# Altium PCB relay_m66.PcbDoc
Units mm, origin at the board's own origin, x right, y up, seen from the top; angles counter-clockwise.
Board outline 83.06 x 99.04 mm, 2 copper layers (Top Layer, Bottom Layer); 45 components, 47 nets, 201 pads, 22 vias.
Unrouted connection lines stored in the file: 1.
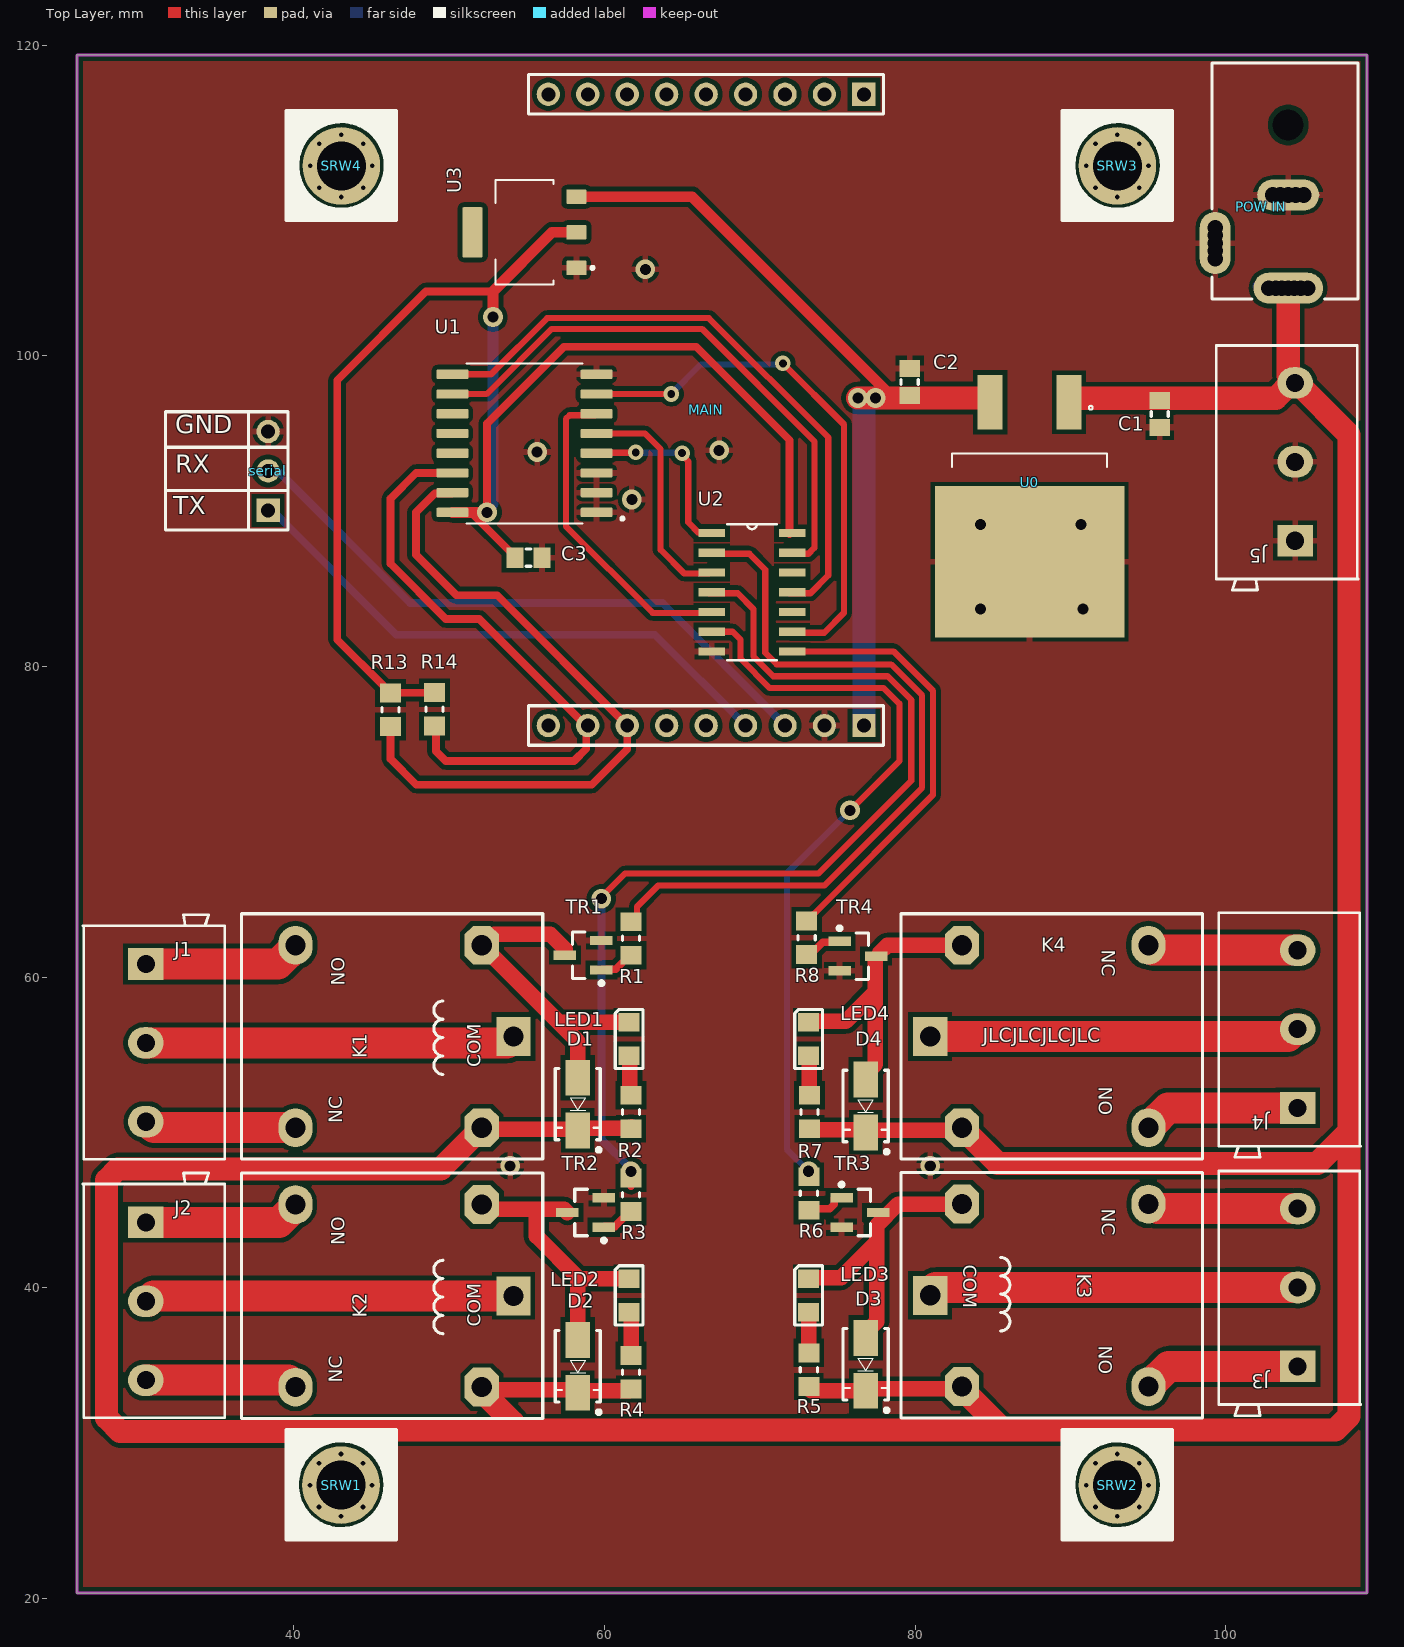
[diagram p0: Top Layer view]
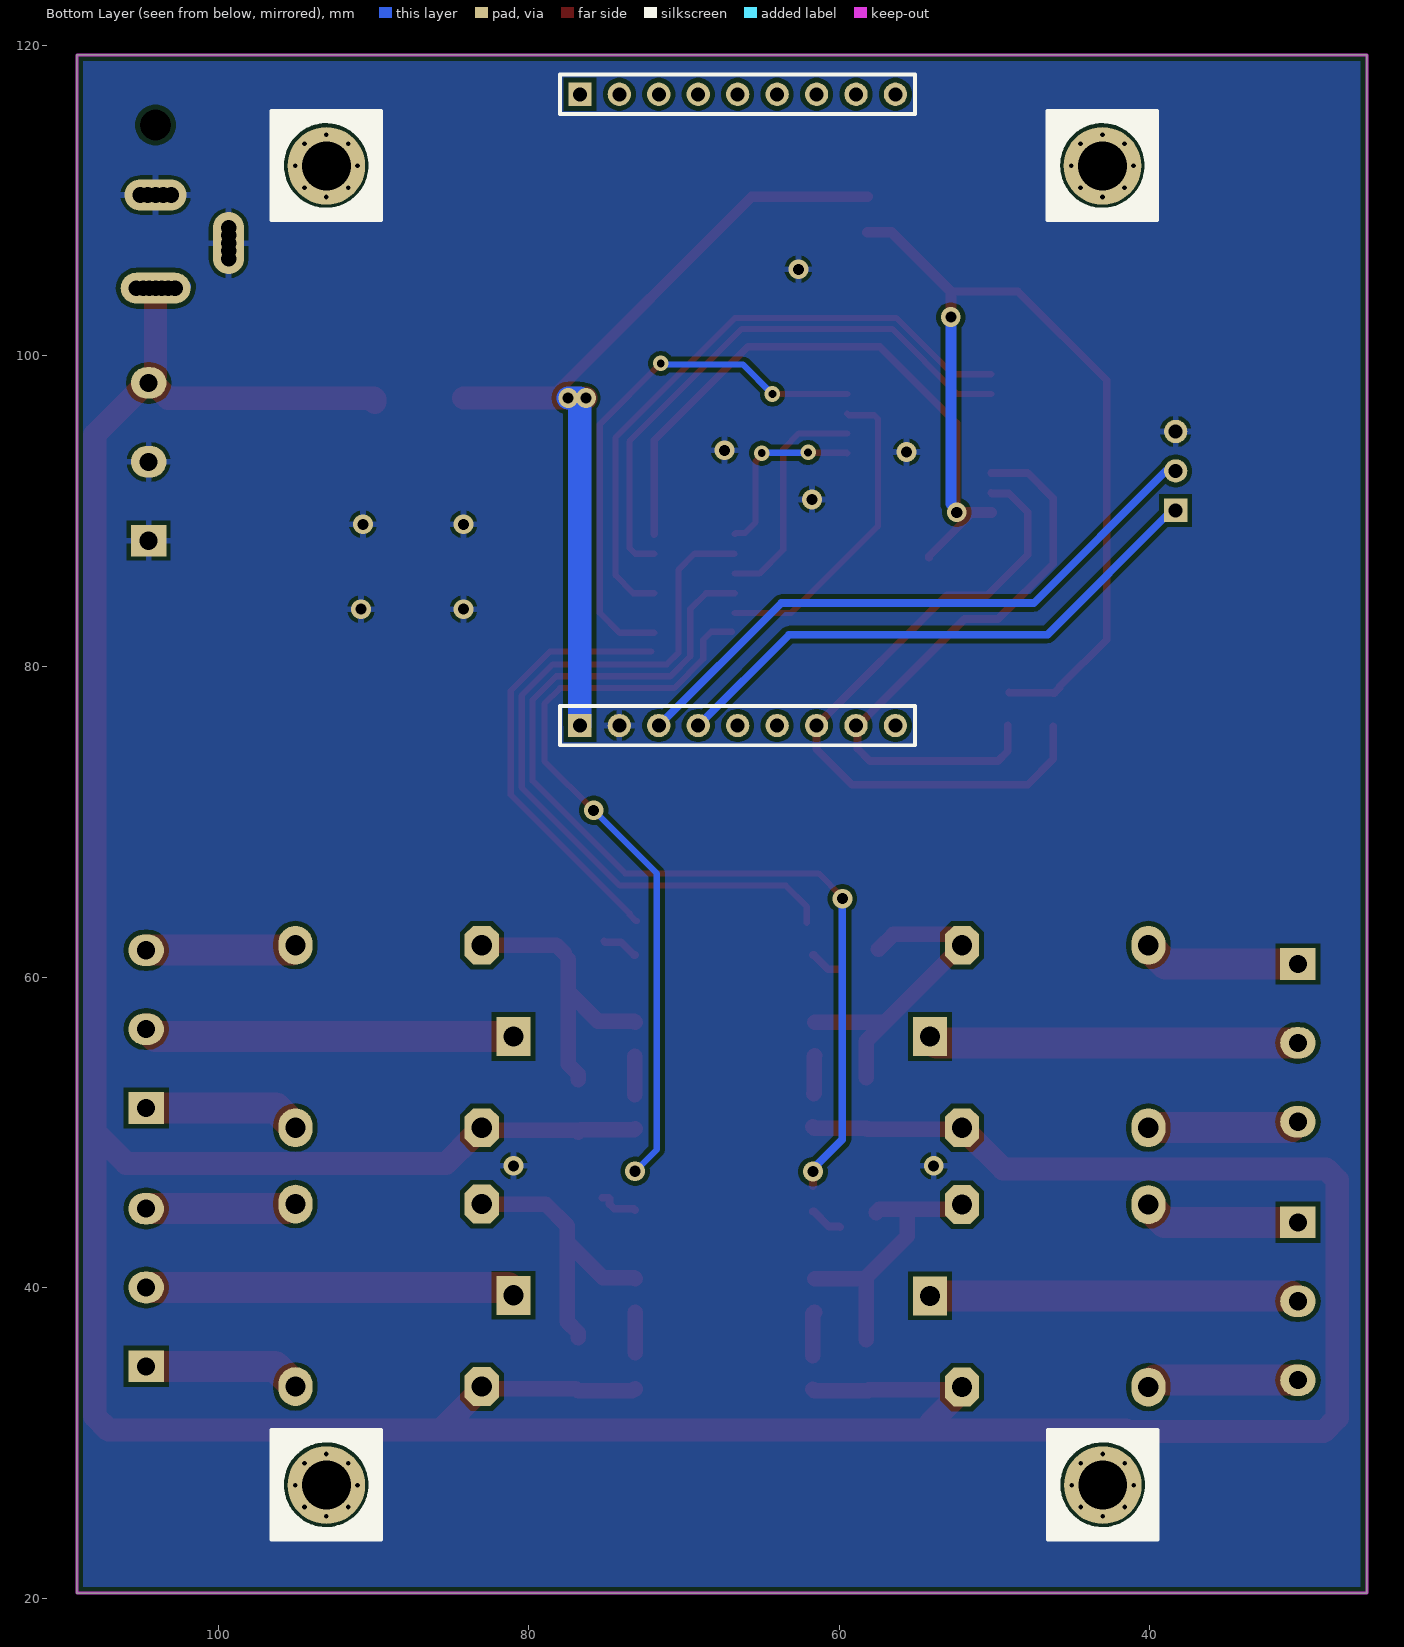
[diagram p1: Bottom Layer view, seen from below]
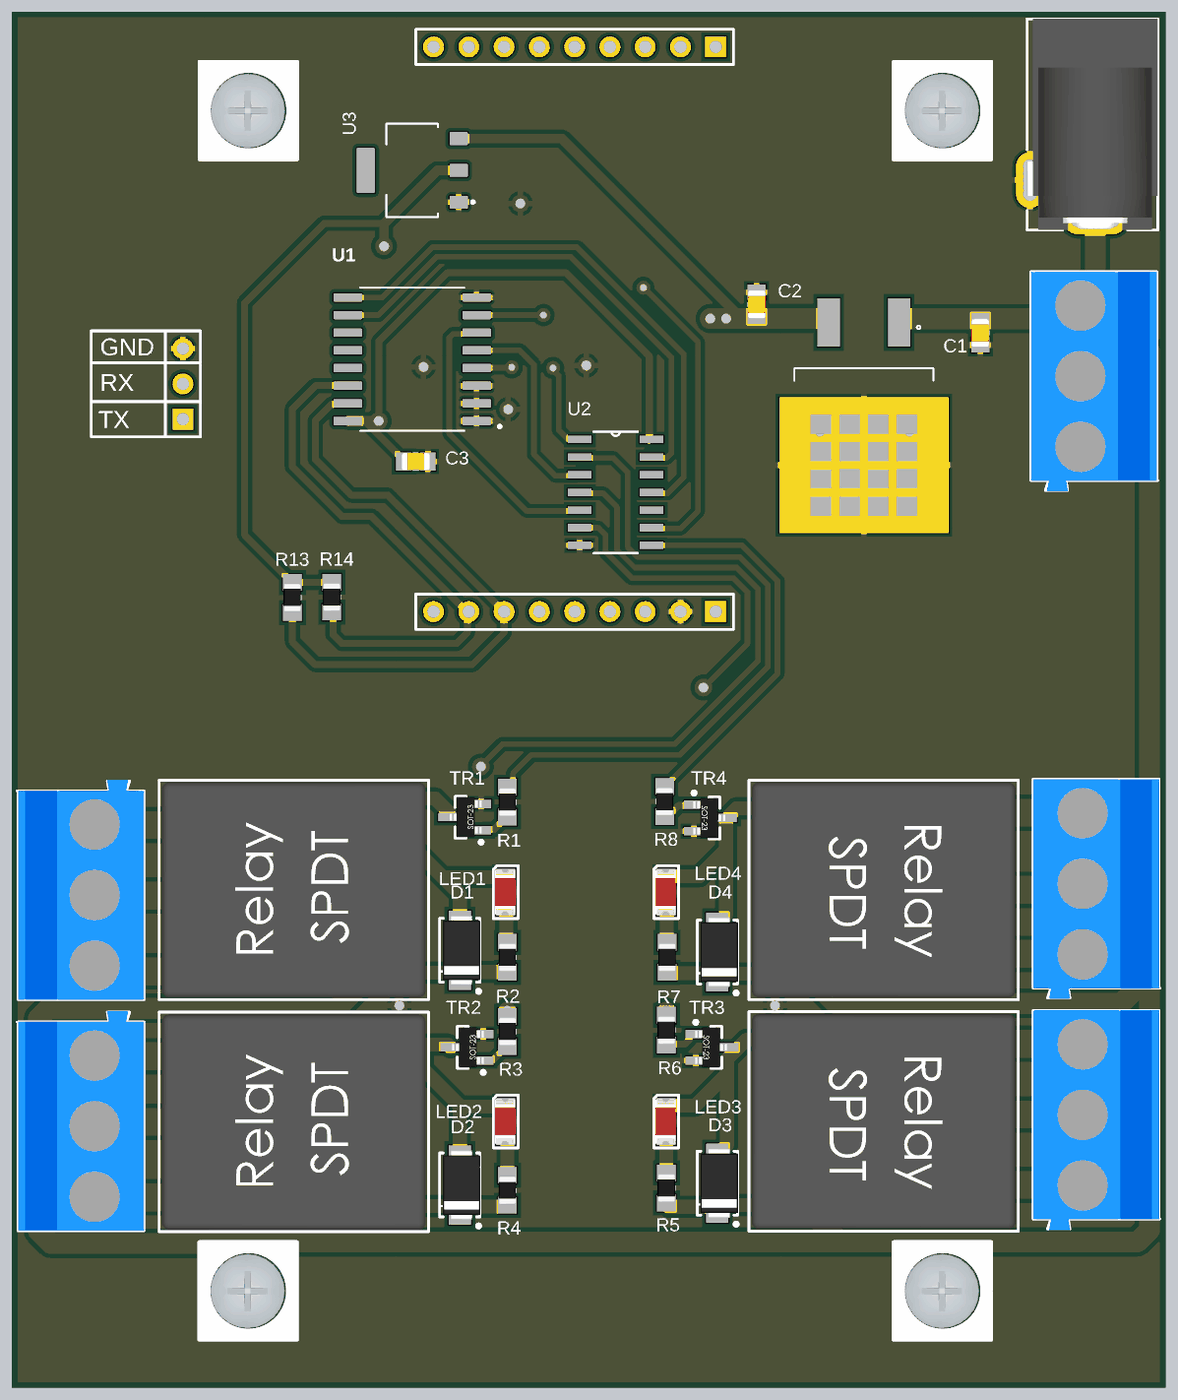
[diagram p2: 3D render of the assembled board from above, using the file's embedded part models]

## Layer stack, top to bottom
Top Solder: solder mask 0.0102, Solder Resist, Dk 3.5
Top Layer: signal copper 0.0356
Dielectric 1: dielectric 0.32, FR-4, Dk 4.8
Bottom Layer: signal copper 0.0356
Bottom Solder: solder mask 0.0102, Solder Resist, Dk 3.5

## Board outline
26.035,20.337 109.093,20.337 109.093,119.38 26.033,119.38 26.035,119.32

## Design rules (kind name [scope] priority, off if disabled: settings)
Clearance [All] p1: gap=0.3 ignorepadtopadclearanceinfootprint=FALSE
PolygonConnect [All] p1: connectstyle=Relief reliefconductorwidth=0.4 reliefentries=4 polygonreliefangle="90 Angle" airgapwidth=0.254
RoutingVias [All] p1: holewidth=0.711 width=1.27 viastyle="Through Hole" minholewidth=0.711 minwidth=1.27 maxholewidth=0.711 maxwidth=1.27
SolderMaskExpansion [All] p1: expansion=0.102 istentingtop=FALSE
Width [All] p1: maxlimit=3 minlimit=0.254 preferedwidth=0.254
30 further rules are at their usual default settings.

## Components (designator, comment, footprint, x,y, rotation, side; value= is the part's Value field where it differs from the comment)
C1 "33nf" "SMD 0805" 95.758,96.266 r90 top
C2 "100nf" "SMD 0805" 79.656,98.32 r270 top
C3 "33nf" "SMD 0805" 55.107,87.005 r0 top
D1 "1n4007" DIOM4629X24N 58.282,51.826 r270 top
D2 "1n4007" DIOM4629X24N 58.282,34.935 r270 top
D3 "1n4007" DIOM4629X24N 76.824,35.062 r270 top
D4 "1n4007" DIOM4629X24N 76.824,51.699 r270 top
J1 "TBlock-3" "KF300-3 PIN" 30.469,60.843 r0 top
J2 "TBlock-3" "KF300-3 PIN" 30.469,44.206 r0 top
J3 "TBlock-3" "KF300-3 PIN" 104.637,34.934 r180 top
J4 "TBlock-3" "KF300-3 PIN" 104.637,51.571 r180 top
J5 "TBlock-3" "KF300-3 PIN" 104.476,88.1 r180 top
K1 "" "Relay 18.85x15.35x15.70" 47.128,56.177 r90 top
K2 "" "Relay 18.85x15.35x15.70" 47.128,39.474 r90 top
K3 "" "Relay 18.85x15.35x15.70" 88,39.507 r270 top
K4 "" "Relay 18.85x15.35x15.70" 88,56.177 r270 top
LED1 "LED 2PIN" "LED 0805" 61.584,56.017 r90 top
LED2 "LED 2PIN" "LED 0805" 61.584,39.507 r90 top
LED3 "LED 2PIN" "LED 0805" 73.141,39.507 r90 top
LED4 "LED 2PIN" "LED 0805" 73.141,56.017 r90 top
MAIN "DB_M66" DB_M66 82.677,112.522 r0 top
"POW IN" "Power jack" "Power Jack" 102.304,109.613 r270 top
R1 "1K" 0805_1/8W 61.711,62.494 r270 top
R2 "4.7K" 0805_1/8W 61.711,51.318 r270 top
R3 "1K" 0805_1/8W 61.711,45.984 r270 top
R4 "4.7K" 0805_1/8W 61.711,34.554 r270 top
R5 "4.7K" 0805_1/8W 73.158,34.718 r270 top
R6 "1K" 0805_1/8W 73.158,46.075 r270 top
R7 "4.7K" 0805_1/8W 73.21,51.318 r270 top
R8 "1K" 0805_1/8W 73.025,62.534 r270 top
R13 "4.7K" 0805_1/8W 46.228,77.216 r90 top
R14 "4.7K" 0805_1/8W 49.059,77.244 r90 top
serial "Header 3" HDR1X3 38.343,90.053 r90 top
SRW1 "Screw" "Board Screw" 43.036,27.288 r90 top
SRW2 "Screw" "Board Screw" 93.031,27.288 r90 top
SRW3 "Screw" "Board Screw" 93.031,112.239 r90 top
SRW4 "Screw" "Board Screw" 43.056,112.239 r90 top
TR1 "BC847C" SOT23_BEC_M 58.631,61.412 r180 top
TR2 "BC847C" SOT23_BEC_M 58.79,44.841 r180 top
TR3 "BC847C" SOT23_BEC_M 76.443,44.841 r0 top
TR4 "BC847C" SOT23_BEC_M 76.316,61.351 r0 top
U0 "L7805ACD2T" VREG_L7805ACD2T 87.376,90.316 r270 top
U1 "PCF8574DW" SOIC127P1030X265-16N 54.853,94.371 r180 top
U2 "74HC04D" SOIC127P600X175-14N 69.5,84.782 r0 top
U3 "AMS1117-3.3" SOT229P700X180-4N 54.853,107.96 r90 top

## Footprints (in the part's own frame and the unit in brackets; to place one, negate y for a bottom-side part, rotate by r counter-clockwise, add the part's x,y. Pads: shape width x height; smd on the part's side, far side on the other; paste and mask are expansions set on the pad)
0805_1/8W [mm] "Chip Resistor, 2-Leads, Body 2.0x1.3mm, IPC High Density _ (0.100 W)"
  rect 1.2x1.35 smd: 1(-1.079,0) 2(1.079,0)
  silkscreen extent -0.15,-0.55 0.15,0.55, body extent -1.02,-0.63 1.02,0.64, height 0.6
"Board Screw" [mm]
  round 0.6 hole 0.3: S(-2,0) S(-1.414,-1.414) S(-1.414,1.414) S(0,2) S(0,-2) S(1.414,-1.414) S(1.414,1.414) S(2,0)
  round 5 hole 3.15 mask+0.1: SRW2(0,0)
  silkscreen extent -3.49,-3.53 3.56,3.52, body extent -2.67,-2.64 2.69,2.72, height 2.34
DB_M66 [mm]
  round 1.5 hole 0.9: 1(-26.29,4.326) 2(-23.75,4.326) 3(-21.21,4.326) 4(-18.67,4.326) 5(-16.13,4.326) 6(-13.59,4.326) 7(-11.05,4.326) 8(-8.51,4.326) 10(-26.289,-36.322) 11(-23.749,-36.322) 12(-21.209,-36.322) 13(-18.669,-36.322) 14(-16.129,-36.322) 15(-13.589,-36.322) 16(-11.049,-36.322) 17(-8.509,-36.322)
  rect 1.5x1.5 hole 0.9: 9(-5.97,4.326) 18(-5.969,-36.322)
  silkscreen extent -27.56,-37.59 -4.7,5.6
DIOM4629X24N [mm] "Molded Diode, 2-Leads, Body 4/60x2/90mm, IPC Medium Density-Design:Abbas Basereh"
  rect 2.3x1.6 smd: 1(-1.7,0) 2(1.7,0)
  silkscreen extent -2.3,-1.45 3.07,1.48, body extent -2.5,-1.22 2.5,1.48, height 2.2
HDR1X3 [mm] "Connector; Header; 3 Position"
  rect 1.5x1.5 hole 0.9: 1(0,0)
  round 1.5 hole 0.9: 2(2.54,0) 3(5.08,0)
  silkscreen extent -1.27,-1.27 6.35,1.27
"KF300-3 PIN" [mil]
  rect 90x80 hole 46: 1(0,0)
  oval 90x80 hole 46: 2(0,-200) 3(0,-400)
  silkscreen extent -160,-495 200,125, body extent -157,-495 200,128, height 503
"LED 0805" [mm]
  rect 1.2x1.35 smd: 1(-1.079,0) 2(1.079,0)
  silkscreen extent -1.91,-0.89 1.91,0.89, body extent -1.65,-0.69 1.65,0.76, height 1.36
"Power Jack" [mm] "Power Adaptor Jack"
  round 1.5 hole 1: 1(5.25,2.125) 1(5.25,2.525) 1(5.25,2.975) 1(5.25,0.475) 1(5.25,0.925) 1(5.25,1.325) 2(-0.75,2.725) 2(-0.75,0.725) 2(-0.75,2.225) 2(-0.75,1.225) 3(1.35,-2.975) 3(1.85,-2.975) 3(2.85,-2.975) 3(3.35,-2.975)
  oval 2x4.5 hole 1: 1(5.25,1.725)
  oval 2x4 hole 1: 2(-0.75,1.725)
  oval 4x2 hole 1: 3(2.35,-2.975)
  round 1.9 hole 2: MH(-5.25,1.725)
  silkscreen extent -9.25,-3.18 5.95,6.23, body extent -9.25,-3.17 5.95,6.23, height 11
"Relay 18.85x15.35x15.70" [mm] "DESIGNER ABBAS BASEREH"
  rect 2.5x2.2 hole 1.3: 1(0,-7.025)
  oval 2.5x2.2 hole 1.3: 2(-5.875,7.025) 3(5.875,7.025)
  oct 2.5x2.2 hole 1.3: 4(-5.875,-4.975) 5(5.875,-4.975)
  silkscreen extent -7.9,-8.9 7.9,10.5, body extent -7.75,-8.7 7.75,10.3, height 15.6
"SMD 0805" [mm]
  rect 1.1x1.3 smd: 1(-0.876,0) 2(0.876,0)
  silkscreen extent -0.15,-0.55 0.15,0.55, body extent -1.02,-0.63 1.02,0.64, height 0.65
SOIC127P600X175-14N [mil]
  rect 67x21 smd: 1(-102,150) 2(-102,100) 3(-102,50) 4(-102,0) 5(-102,-50) 6(-102,-100) 7(-102,-150) 8(102,-150) 9(102,-100) 10(102,-50) 11(102,0) 12(102,50) 13(102,100) 14(102,150)
  silkscreen extent -63,-172 63,172
SOIC127P1030X265-16N [mm]
  rrect25% 2.06x0.6 smd: 1(-4.64,4.445) 2(-4.64,3.175) 3(-4.64,1.905) 4(-4.64,0.635) 5(-4.64,-0.635) 6(-4.64,-1.905) 7(-4.64,-3.175) 8(-4.64,-4.445) 9(4.64,-4.445) 10(4.64,-3.175) 11(4.64,-1.905) 12(4.64,-0.635) 13(4.64,0.635) 14(4.64,1.905) 15(4.64,3.175) 16(4.64,4.445)
  silkscreen extent -6.4,-5.15 3.75,5.15
SOT23_BEC_M [mm] "SOT23, 3-Leads, Body 2.9x1.3mm, Pitch 0.95mm, Lead Span 2.4mm, IPC Low Density"
  rect 1.45x0.6 smd: 1(-1.175,0.95) 2(-1.175,-0.95) 3(1.175,0)
  silkscreen extent -1.3,-1.5 0.7,1.92, body extent -1.23,-1.45 1.07,1.45, height 1
SOT229P700X180-4N [mm]
  rrect15% 0.93x1.31 smd: 1(-2.29,-3.345) 2(0,-3.345) 3(2.29,-3.345)
  rrect15% 3.24x1.31 smd: 4(0,3.345)
  silkscreen extent -3.36,-4.47 3.36,1.86
VREG_L7805ACD2T [mm]
  rect 3.5x1.6 smd: 1(-6.7,2.54) 3(-6.7,-2.54)
  rect 9.75x12.2 smd paste-7: 4(3.575,0)
  silkscreen extent -6.48,-5 -2.51,5

## Part data
C1 C2 C3: library part "CAP NON"
D1 D2 D3 D4: library part "1n4007 SMD M7", "Standard Rectifiers", Manufacturer="DC COMPONENTS", Data=16-12-2016, Designer="Abbas Basereh", Link=http://www.tme.eu/en/details/m7/smd-universal-diodes/dc-components/, Part. No=M7
K1 K2 K3 K4: library part Relay_SPDT, "Single-Pole Dual-Throw Relay", ComponentLink1Description=Datasheet, Designer="Abbas Basereh", Mounting Technology=Through-Hole, Pin Count=0, Update Date=2017-3-1
R1 R2 R3 R4 R5 R6 R7 R8 R13 R14: library part RESISTOR
serial: "Header, 3-Pin", LatestRevisionDate=17-Jul-2002, LatestRevisionNote="Re-released for DXP Platform.", Publisher="Altium Limited"
SRW1 SRW2 SRW3 SRW4: library part "Board Screw 3MM", "Board Screw With Spacer"
TR1 TR2 TR3 TR4: library part "NPN SMD"
U0: "Linear Voltage Regulator IC 1 Output 1.5A D2PAK", Package="D2PAK STMicroelectronics", Availability=Unavailable, MF=STMicroelectronics, MP=L7805ACD2T, Price=None, SnapEDA_Link=https://www.snapeda.com/parts/L7805ACD2T/STMicroelectronics/view-part/680973/?ref=snap
U1: "Remote 8-Bit I/O Expander for I2C-Bus 16-SOIC -40 to 85", Package="SOIC-16 Texas Instruments", Availability=Unavailable, DigiKey-Purchase-URL=https://snapeda.com/shop?store=DigiKey&id=480923, MF="Texas Instruments", Mouser-Purchase-URL=https://snapeda.com/shop?store=Mouser&id=480923, MP=PCF8574DW, Price=None, SnapEDA_Link=https://www.snapeda.com/parts/PCF8574DW/Texas%20Instruments/view-part/480923/?ref=snap, Texas_Instruments-Purchase-URL=https://snapeda.com/shop?store=Texas+Instruments&id=480923
U2: "Inverter IC 6 Channel 14-SOIC", Package="SOIC-14 NXP Semiconductors", Availability=Unavailable, MF=Toshiba, MP=74HC04D, Price=None, SnapEDA_Link=https://www.snapeda.com/parts/74HC04D/Toshiba%20Semiconductor%20and%20Storage/view-part/1040011/?ref=snap
U3: "Sot223/Pkg 1-Amp 3.3-Volt Low Drop Out Voltage Regulatator", Package=None, Availability=Unavailable, MF="Advanced Monolithic Systems", MP=AMS1117-3.3, Price=None, SnapEDA_Link=https://www.snapeda.com/parts/AMS1117-3.3/Advanced%20Monolithic%20Systems/view-part/53450/?ref=snap

## Via types
v1: diameter 1.27, hole 0.711, Top Layer to Bottom Layer, tented both sides, 18 vias
v2: diameter 1, hole 0.5, Top Layer to Bottom Layer, tented both sides, 4 vias

## Nets (pads, with @x,y where several pads share a name; then routed paths per layer and width w, separated by ;. In a path a pad name is that pad's centre, name@x,y a point inside that pad or via, vN(x,y) a via of type N, cw(c..) or ccw(c..) an arc to the next point about the centre after c; other vN are vias at no path point)
3V3: C3.1 R13.2 R14.2 U1.16 U2.14 U3.2 | length 100.8
  Top Layer w0.5: R14.2 49.045,78.309 46.242,78.309 R13.2 46.153,78.295 45.803,78.645 45.803,78.72 42.788,81.735 42.788,98.435 48.503,104.15 52.821,104.15 ; U1.16 50.263,89.876 51.46,89.876 54.231,87.105 C3.1 ; v1(52.44,89.926) 52.44,95.641 57.393,100.594 65.902,100.594 71.922,94.574 U2.14@71.922,88.529
  Top Layer w0.7: U1.16 v1(52.44,89.926) ; v1(52.821,102.499) 52.821,104.15 56.631,107.96 U3.2
  Bottom Layer w0.7: 52.821,90.461 v1(52.821,102.499)
5V: C2.2 MAIN.18 U0.3 U3.3 | length 55.5
  Top Layer w0.7: U3.3 65.644,110.25 78.602,97.292
  Top Layer w1.5: v1(76.316,97.292) v1(77.459,97.292) 78.602,97.292 U0.3@84.202,97.292
  Bottom Layer w1.5: MAIN.18 76.708,97.292 v1(77.459,97.292)
12V: "POW IN.1" C1.2 D1.2 D2.2 D3.2 D4.2 J5.3 K1.4 K2.4 K3.5 K4.5 R2.2 R4.2 R5.2 R7.2 U0.1 | length 287.7
  Top Layer w1: K2.4 52.285,33.417 58.1,33.417 58.142,33.375 61.611,33.375 R4.2 ; K1.4 52.191,50.214 58.194,50.214 58.246,50.266 61.611,50.266 R2.2@61.711,50.366 ; R5.2@73.134,33.482 73.141,33.475 73.216,33.475 73.329,33.362 D3.2 76.959,33.497 82.89,33.497 K3.5 ; R7.2@73.141,50.239 73.205,50.175 76.648,50.175 D4.2 76.976,50.151 K4.5@83.001,50.151
  Top Layer w1.5: K2.4 52.103,33.339 54.102,31.34 54.102,30.838 ; K1.4 52.103,50.263 51.753,49.913 51.714,49.913 49.45,47.649 28.666,47.649 27.94,46.923 27.94,31.613 28.819,30.734 41.462,30.734 41.566,30.838 54.102,30.838 ; K3.5 83.025,33.482 85.67,30.838 ; K4.5 83.025,50.263 83.486,49.802 83.525,49.802 85.325,48.002 105.914,48.002 107.943,50.031 ; U0.1 89.916,97.232 89.966,97.282 103.227,97.282 104.205,98.26 J5.3 ; 104.029,104.363 104.029,98.724 104.476,98.277 J5.3 ; 54.102,30.838 85.67,30.838 ; 85.67,30.838 107.064,30.838 107.943,31.716 107.943,50.031 ; J5.3 104.603,98.26 107.943,94.92 107.943,50.031
  Bottom Layer w0.8: 102.14,104.478 104.912,104.478
CLK: MAIN.9
DATA: MAIN.6
GND: "POW IN.2" "POW IN.3" C1.1 C2.1 C3.2 J5.1 J5.2 MAIN.17 serial.3 TR1.2 TR2.2 TR3.2 TR4.2 U0.4 U1.1 U1.2 U1.3 U1.8 U2.7 U3.1
  other v1: 53.927,47.851 80.978,47.851 84.201,83.693 90.805,83.693 84.201,89.154 90.678,89.154 61.765,90.761 55.669,93.809 67.39,93.92 62.636,105.574
L_OUT_1: U1.4 U2.1 | length 11.8
  Top Layer w0.4: U1.4 59.517,93.76 61.989,93.76 v2(62.013,93.784) ; v2(64.997,93.741) 64.997,93.604 65.394,93.207 65.394,89.291 66.089,88.596 66.674,88.596 U2.1@66.74,88.529
  Bottom Layer w0.4: v2(62.013,93.784) 62.034,93.763 64.975,93.763 v2(64.997,93.741)
L_OUT_2: U1.5 U2.3 | length 14.8
  Top Layer w0.4: U1.5 62.6,95.006 63.616,93.99 63.616,87.513 65.14,85.989 U2.3@66.74,85.989
L_OUT_3: U1.6 U2.5 | length 20.6
  Top Layer w0.4: U1.6 59.393,96.176 57.754,96.176 57.52,95.942 57.52,89.037 63.108,83.449 U2.5@66.74,83.449
L_OUT_4: U1.7 U2.9 | length 34.5
  Top Layer w0.4: U1.7@59.494,97.547 v2@64.306,97.547 ; v2(71.496,99.514) 75.427,95.584 75.427,83.449 74.157,82.179 U2.9@71.922,82.179
  Bottom Layer w0.4: v2(64.307,97.548) 66.21,99.451 71.433,99.451 v2(71.496,99.514)
L_OUT_5: U1.9 U2.11 | length 40.7
  Top Layer w0.4: U1.9 52.694,98.816 56.315,102.437 66.726,102.437 74.411,94.752 74.411,85.862 73.268,84.719 U2.11@71.922,84.719
L_OUT_6: U1.10 U2.13 | length 36.7
  Top Layer w0.4: U1.10 52.414,97.546 56.605,101.737 66.283,101.737 73.522,94.498 73.522,87.64 73.141,87.259 U2.13@71.922,87.259
NetD1_1: D1.1 K1.5 LED1.2 TR1.3 | length 21.7
  Top Layer w1: 57.488,61.801 57.463,61.801 56.516,62.748 52.906,62.748 52.21,62.052 K1.5 57.059,57.096 ; D1.1 58.282,55.873 57.059,57.096 ; LED1.2 57.059,57.096
NetD2_1: D2.1 K2.5 LED2.2 TR2.3 | length 18.6
  Top Layer w1: K2.5 52.411,45.041 55.615,45.041 ; TR2.3 57.415,45.041 55.615,45.041 ; D2.1 58.282,40.65 ; LED2.2 58.346,40.586 55.615,43.317 55.615,45.041
NetD3_1: D3.1 K3.4 LED3.2 TR3.3 | length 19.1
  Top Layer w1: LED3.2 73.205,40.65 75.234,40.65 77.52,42.936 ; D3.1 76.824,37.112 77.52,37.808 77.52,42.936 ; K3.4@83.152,45.382 78.914,45.382 77.52,43.988 77.52,43.888 77.52,42.936
NetD4_1: D4.1 K4.4 LED4.2 TR4.3 | length 18.8
  Top Layer w1: LED4.2 73.205,57.16 75.543,57.16 77.448,59.065 ; D4.1 76.824,53.749 77.448,54.373 77.448,59.065 ; TR4.3@77.448,61.151 77.448,59.065 ; TR4.3@77.716,61.551 78.217,62.052 K4.4@83.152,62.052
NetJ1_1: J1.1 K1.3 | length 10.2
  Top Layer w2: J1.1 38.99,60.843 40.103,61.956 K1.3
NetJ1_2: J1.2 K1.1 | length 23.9
  Top Layer w2: J1.2 53.739,55.763 53.903,55.927 54.053,55.927 54.153,56.027 K1.1
NetJ1_3: J1.3 K1.2 | length 9.8
  Top Layer w2: J1.3 30.605,50.683 30.986,50.302 K1.2
NetJ2_1: J2.1 K2.3 | length 10.2
  Top Layer w2: J2.1 39.056,44.206 40.103,45.253 K2.3
NetJ2_2: J2.2 K2.1 | length 23.8
  Top Layer w2: J2.2 30.605,39.126 30.953,39.474 K2.1
NetJ2_3: J2.3 K2.2 | length 9.9
  Top Layer w2: J2.3 39.656,34.046 39.915,33.787 40.011,33.787 40.103,33.695 K2.2
NetJ3_1: J3.1 K3.3 | length 10.2
  Top Layer w2: K3.3 95.025,33.728 95.117,33.82 95.213,33.82 96.327,34.934 J3.1
NetJ3_2: J3.2 K3.1 | length 24
  Top Layer w2: K3.1@81.102,39.507 81.102,39.657 K3.1@81.459,40.014 ; K3.1@81.332,40.014 J3.2
NetJ3_3: J3.3 K3.2 | length 9.8
  Top Layer w2: K3.2 95.025,45.286 95.117,45.194 95.505,45.194 95.604,45.095 99.952,45.095 99.954,45.094 J3.3
NetJ4_1: J4.1 K4.3 | length 10.2
  Top Layer w2: K4.3 95.025,50.398 95.117,50.49 95.213,50.49 96.294,51.571 J4.1
NetJ4_2: J4.2 K4.1 | length 23.9
  Top Layer w2: K4.1 104.028,56.177 104.501,56.651 J4.2
NetJ4_3: J4.3 K4.2 | length 9.8
  Top Layer w2: K4.2 95.025,61.956 95.25,61.731 J4.3
NetLED1_1: LED1.1 R2.1 | length 2.5
  Top Layer w1: LED1.1 61.623,54.9 61.623,52.513 R2.1@61.661,52.474
NetLED2_1: LED2.1 R4.1 | length 2.9
  Top Layer w1: LED2.1 61.611,38.428 61.711,38.328 R4.1
NetLED3_1: LED3.1 R5.1 | length 2.6
  Top Layer w0.5: R5.1@73.15,35.805 R5.1
  Top Layer w1: R5.1@73.15,35.805 LED3.1@73.15,38.42
NetLED4_1: LED4.1 R7.1 | length 2.6
  Top Layer w0.5: LED4.1 LED4.1@73.176,54.904 ; R7.1@73.176,52.432 R7.1
  Top Layer w1: R7.1@73.176,52.432 LED4.1@73.176,54.904
NetMAIN_11: MAIN.11 R14.1 U1.14 | length 39.3
  Top Layer w0.5: R14.1@49.149,76.2 49.149,74.549 49.784,73.914 58.039,73.914 58.825,74.7 58.825,76.097 MAIN.11 58.801,76.2 51.943,83.058 49.784,83.058 46.228,86.614 46.228,90.815 47.879,92.466 U1.14
NetMAIN_12: MAIN.12 R13.1 U1.15 | length 44.3
  Top Layer w0.5: R13.1 46.228,74.041 47.879,72.39 59.182,72.39 61.468,74.676 MAIN.12 53.086,84.582 50.477,84.582 47.868,87.191 47.868,89.928 49.086,91.146 50.163,91.146 U1.15
NetR1_2: R1.2 TR1.1 | length 2.3
  Top Layer w0.5: TR1.1 59.856,60.512 60.733,60.512 61.636,61.415 R1.2
NetR3_2: R3.2 TR2.1 | length 2.2
  Top Layer w0.5: TR2.1 60.015,43.941 60.672,43.941 61.636,44.905 R3.2
NetR6_2: R6.2 TR3.1 | length 2.7
  Top Layer w0.5: R6.2 73.247,45.085 74.5,45.085 74.793,45.378 74.793,45.741 74.843,45.791 TR3.1
NetR8_2: R8.2 TR4.1 | length 2.4
  Top Layer w0.5: R8.2@73.141,61.415 73.216,61.415 74.052,62.251 75.091,62.251 TR4.1
OUT_1: R1.1 U2.2 | length 49.1
  Top Layer w0.4: R1.1@62.102,63.496 62.102,64.546 63.449,65.893 74.148,65.893 80.456,72.201 80.456,78.141 78.46,80.137 71.101,80.137 70.358,80.88 70.358,86.233 69.335,87.256 U2.2@66.757,87.256
OUT_2: R3.1 U2.4 | length 65.3
  Top Layer w0.4: v1(59.799,65.051) 59.799,65.133 61.341,66.675 73.787,66.675 79.756,72.644 79.756,77.851 78.232,79.375 70.873,79.375 69.596,80.652 69.596,83.703 68.58,84.719 U2.4@66.74,84.719
  Top Layer w0.5: v1(61.698,47.475) 61.704,47.469 61.704,46.562 R3.1@61.711,46.555
  Bottom Layer w0.5: v1(59.799,65.051) 59.806,65.044 59.806,49.54 61.698,47.648 v1(61.698,47.475)
OUT_3: R6.1 U2.6 | length 48.8
  Top Layer w0.254: R6.1@73.121,47.117 73.152,47.148 v1(73.152,47.498)
  Top Layer w0.4: U2.6 68.253,82.242 68.768,81.727 68.768,80.49 70.645,78.613 77.978,78.613 78.994,77.597 78.994,73.914 v1@75.855,70.775
  Bottom Layer w0.4: v1(73.152,47.498) 71.755,48.895 71.755,66.675 v1(75.819,70.739)
OUT_4: R8.1 U2.8 | length 28.3
  Top Layer w0.4: U2.8 78.615,80.972 81.156,78.431 81.156,71.744 73.5,64.088 73.5,64.013 73.1,63.613 R8.1
OUT_5: U2.10
OUT_6: U2.12
RX: MAIN.16 serial.2 | length 40.1
  Bottom Layer w0.5: serial.2 38.978,92.593 47.487,84.084 63.744,84.084 MAIN.16
TX: MAIN.15 serial.1 | length 36.5
  Bottom Layer w0.5: serial.1 38.597,90.053 46.598,82.052 63.236,82.052 MAIN.15
WRITE: MAIN.8
pads on no net: "POW IN.MH" MAIN.1 MAIN.2 MAIN.3 MAIN.4 MAIN.5 MAIN.7 MAIN.10 MAIN.13 MAIN.14 SRW1.S SRW1.SRW2 SRW2.S SRW2.SRW2 SRW3.S SRW3.SRW2 SRW4.S SRW4.SRW2 U1.11 U1.12 U1.13 U3.4

## Polygon pours and split planes (outlines as drawn)
GND on Bottom Layer "GND_L02_P000" (solid, pour order 0): 25.908,119.38 109.093,119.38 109.093,20.32 25.908,20.32
GND on Top Layer "GND_L01_P001" (solid, pour order 1): 25.908,119.38 109.093,119.38 109.093,20.32 25.908,20.32

## Keep-outs
Keep-Out Layer:
  lines w0.2: 26.033,119.38 109.093,119.38 109.093,20.337 26.035,20.337 26.035,119.32

## Silkscreen, mask and mechanical layers (free items; w line width, h text height)
Top Overlay:
  lines w0.2: 36.565,94.117 39.613,94.117 ; 37.073,88.783 31.739,88.783 31.739,89.037 31.739,96.403 37.327,96.403 ; 37.073,94.117 31.739,94.117 31.739,91.323 37.073,91.323 39.613,91.323
  text "GND" at 32.374,94.647 h2
  text "RX" at 32.374,92.085 h2
  text "TX" at 32.247,89.418 h2
  text "JLCJLCJLCJLC" at 84.36,55.806 h0.9

## Text inside footprints (layer, text, board x,y; h text height)
K1: Top Overlay "NC" at 43.394,50.589 h1.5 r90; Top Overlay "NO" at 43.572,59.428 h1.5 r90; Top Overlay "COM" at 52.31,54.196 h1.5 r90
K2: Top Overlay "NC" at 43.394,33.886 h1.5 r90; Top Overlay "NO" at 43.572,42.725 h1.5 r90; Top Overlay "COM" at 52.31,37.493 h1.5 r90
K3: Top Overlay "COM" at 82.818,41.488 h1.5 r270; Top Overlay "NO" at 91.556,36.256 h1.5 r270; Top Overlay "NC" at 91.734,45.095 h1.5 r270
K4: Top Overlay "NO" at 91.556,52.926 h1.5 r270; Top Overlay "NC" at 91.734,61.765 h1.5 r270